# EAGLE board esp32 with mpu6050 (EAGLE 9.6.2)
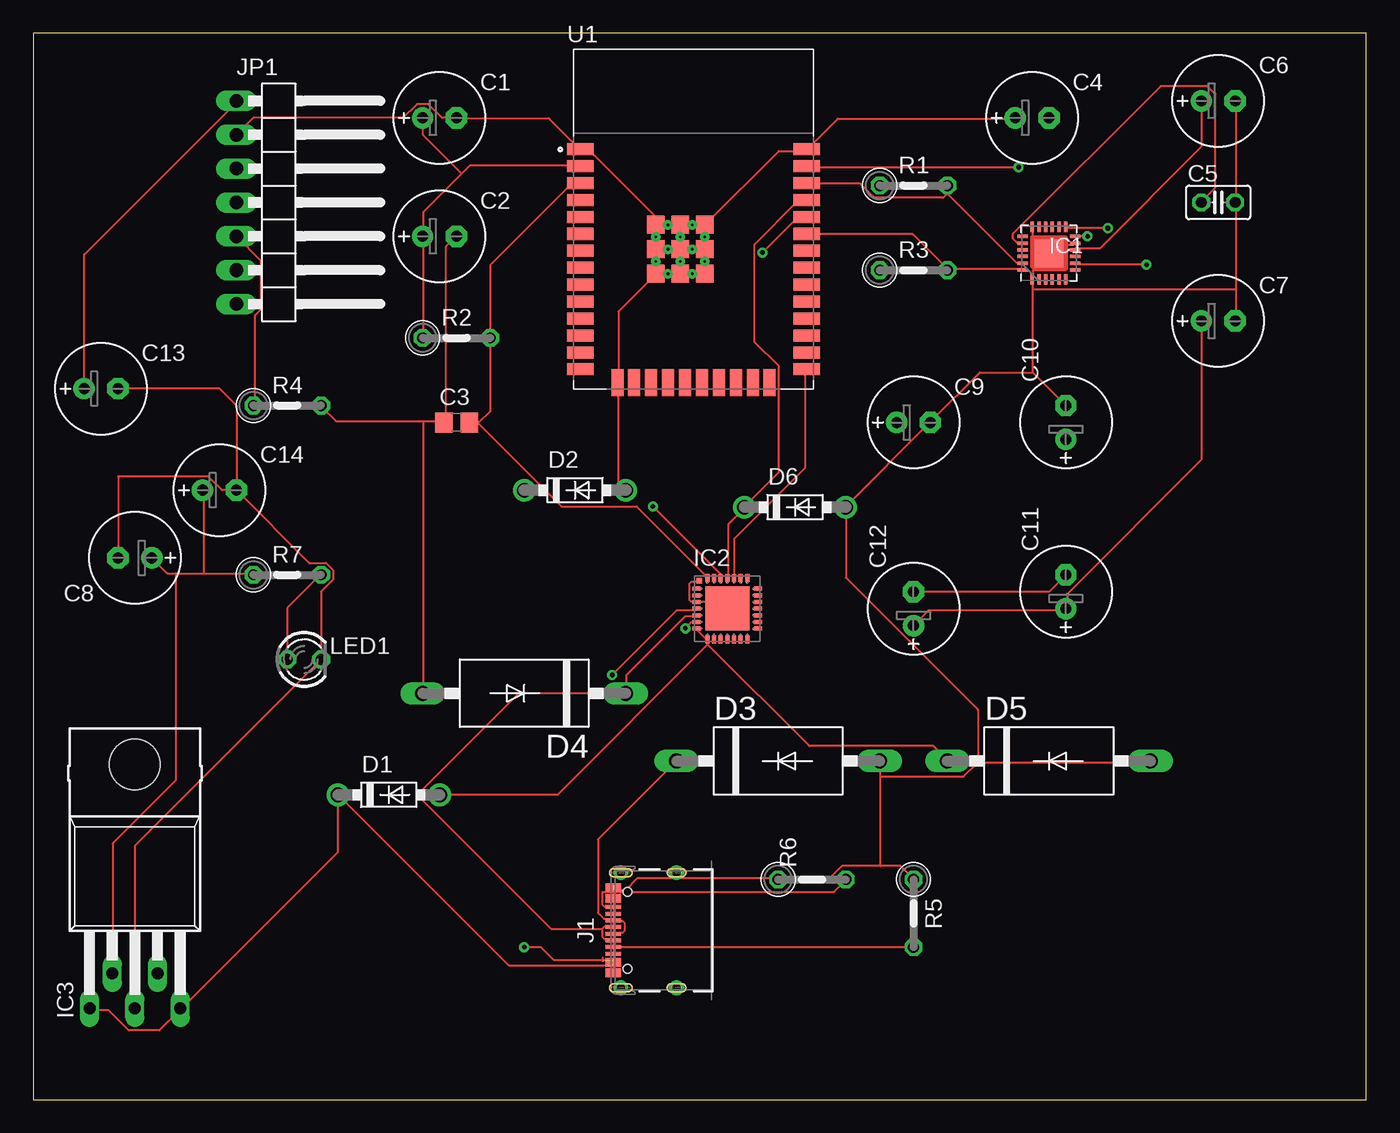
[diagram p0: board, top side]
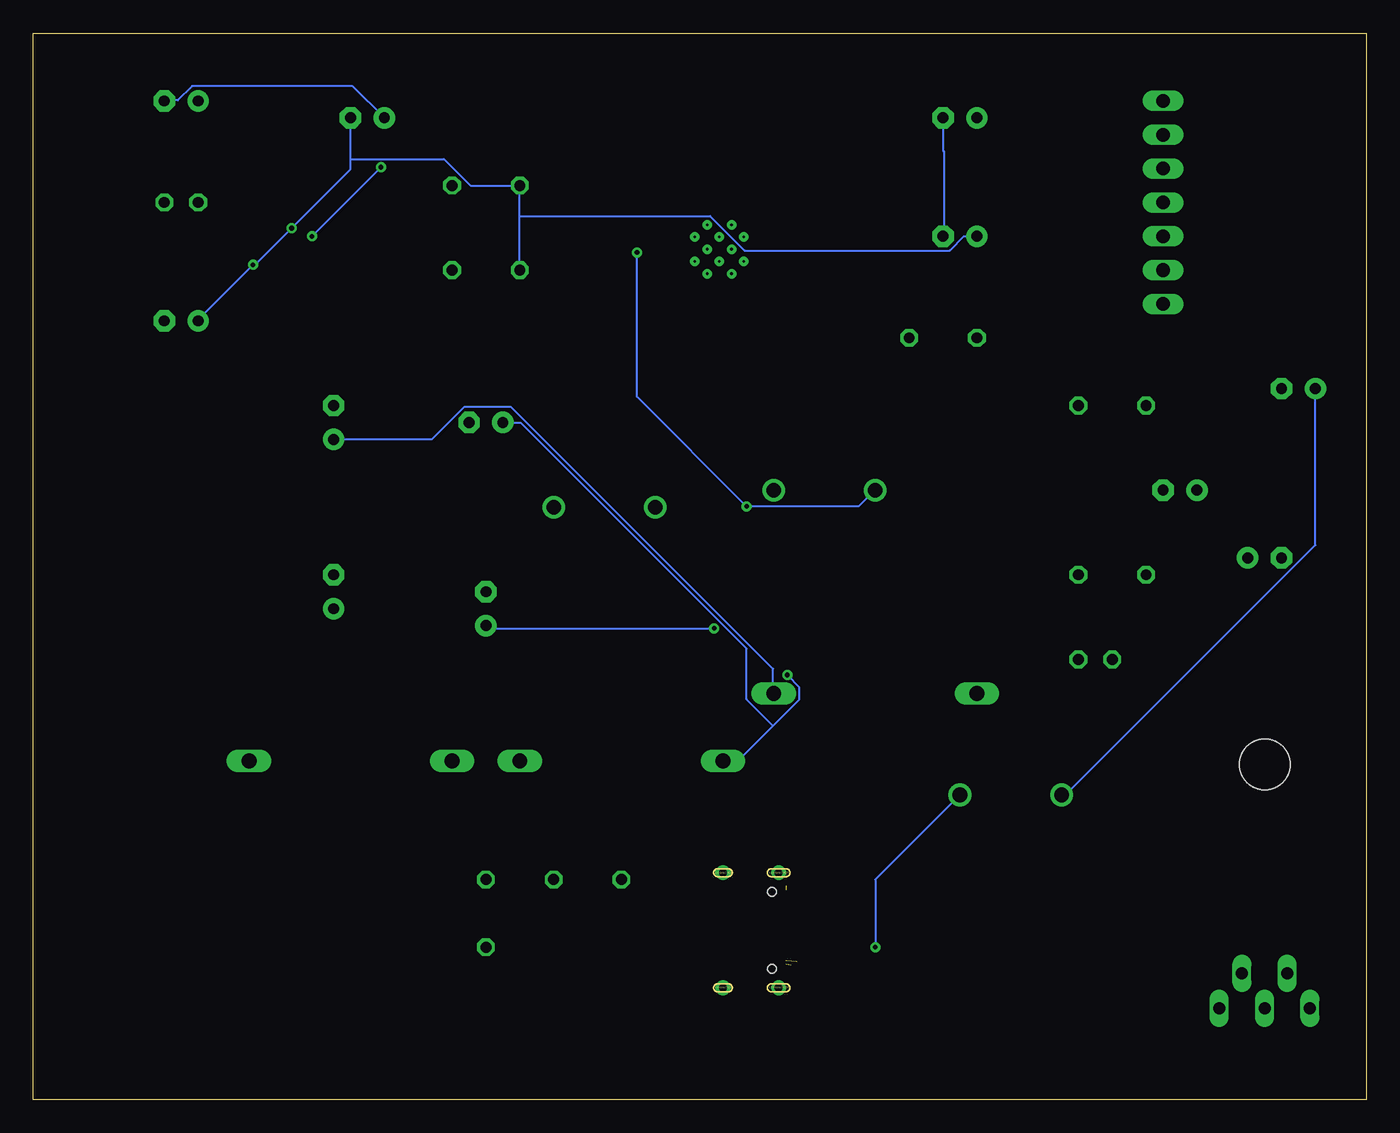
[diagram p1: board, bottom side, seen from below]

Size 100 x 80 mm. Coordinates in mm from the lower left corner, seen from the top.
Outline: 0,0 100,0 100,80 0,80 0,0
Copper layers (1*16): Top 0.035mm / dielectric 1.5mm / Bottom 0.035mm
Design rules "default": minimum track width 6mil, minimum drill 0.35mm, track to track 6mil, track to pad 6mil, pad to pad 6mil, via to via 6mil, smd to smd 6mil, copper to edge 40mil, drill to drill 6mil, minimum pad ring 10mil, minimum via ring 8mil, stop-mask expansion 4mil, vias tented up to drill 0mil, thermal gap 10mil

## Footprints (pad centres in the part's own frame; a part is rotated, then mirrored left to right if it is on the bottom)
E2,5-7 = drill 0.813 pad 1.6: + -1.27,0 | drill 0.813 pad 1.6 octagon: - 1.27,0
C0805 = smd 1.3 x 1.5: 1 -0.95,0; 2 0.95,0
C025-025X050 = drill 0.813 octagon: 1 -1.27,0; 2 1.27,0
DO41-7.6 = drill 1.1 pad 1.7: A 3.81,0; C -3.81,0
P3-15 = drill 1.118 long: A 7.62,0; C -7.62,0
QFN50P400X400X95-25T265X275N = smd 0.26 x 0.79: 1 -1.25,-1.97; 2 -0.75,-1.97; 3 -0.25,-1.97; 4 0.25,-1.97; 5 0.75,-1.97; 6 1.25,-1.97; 13 1.25,1.97; 14 0.75,1.97; 15 0.25,1.97; 16 -0.25,1.97; 17 -0.75,1.97; 18 -1.25,1.97 | smd 0.79 x 0.26: 7 1.97,-1.25; 8 1.97,-0.75; 9 1.97,-0.25; 10 1.97,0.25; 11 1.97,0.75; 12 1.97,1.25; 19 -1.97,1.25; 20 -1.97,0.75; 21 -1.97,0.25; 22 -1.97,-0.25; 23 -1.97,-0.75; 24 -1.97,-1.25 | smd 2.15 x 2.05: 25 0,0
MLP28 = smd 0.6 x 0.3: 1 -2.3,1.5; 2 -2.3,1; 3 -2.3,0.5; 4 -2.3,0; 5 -2.3,-0.5; 6 -2.3,-1; 7 -2.3,-1.5; 15 2.3,-1.5; 16 2.3,-1; 17 2.3,-0.5; 18 2.3,0; 19 2.3,0.5; 20 2.3,1; 21 2.3,1.5 | smd 0.3 x 0.6: 8 -1.5,-2.3; 9 -1,-2.3; 10 -0.5,-2.3; 11 0,-2.3; 12 0.5,-2.3; 13 1,-2.3; 14 1.5,-2.3; 22 1.5,2.3; 23 1,2.3; 24 0.5,2.3; 25 0,2.3; 26 -0.5,2.3; 27 -1,2.3; 28 -1.5,2.3 | smd 3.3 x 3.3: EXP 0,0 | smd 0.435 x 0.435: M -2.103,2.103
TO220-52 = drill 0.9 long: 1 -3.4,-21.1; 2 -1.7,-18.47; 3 0,-21.1; 4 1.7,-18.47; 5 3.4,-21.1 | hole 3.8: 0,-2.8
629722000214 = smd 0.3 x 1.15: A1 -3.35,4.745; A4 -2.55,4.745; A5 -1.25,4.745; A6 -0.25,4.745; A7 0.25,4.745; A8 1.25,4.745; A9 2.55,4.745; A12 3.35,4.745; B1 3.05,4.745; B4 2.25,4.745; B5 1.75,4.745; B6 0.75,4.745; B7 -0.75,4.745; B8 -1.75,4.745; B9 -2.25,4.745; B12 -3.05,4.745 | drill 0.6 pad 1: S1 -4.32,4.18; S2 4.32,4.18; S3 -4.32,0; S4 4.32,0 | hole 0.65: -2.89,3.68; 2.89,3.68
1X07/90 = drill 1.016 long: 1 -7.62,-3.81; 2 -5.08,-3.81; 3 -2.54,-3.81; 4 0,-3.81; 5 2.54,-3.81; 6 5.08,-3.81; 7 7.62,-3.81
LED3MM = drill 0.813 octagon: A -1.27,0; K 1.27,0
0207/5V = drill 0.813 octagon: 1 -2.54,0; 2 2.54,0
MODULE_ESP32-WROOM-32D = smd 2 x 0.9: 1 -8.5,5.26; 2 -8.5,3.99; 3 -8.5,2.72; 4 -8.5,1.45; 5 -8.5,0.18; 6 -8.5,-1.09; 7 -8.5,-2.36; 8 -8.5,-3.63; 9 -8.5,-4.9; 10 -8.5,-6.17; 11 -8.5,-7.44; 12 -8.5,-8.71; 13 -8.5,-9.98; 14 -8.5,-11.25; 25 8.5,-11.25; 26 8.5,-9.98; 27 8.5,-8.71; 28 8.5,-7.44; 29 8.5,-6.17; 30 8.5,-4.9; 31 8.5,-3.63; 32 8.5,-2.36; 33 8.5,-1.09; 34 8.5,0.18; 35 8.5,1.45; 36 8.5,2.72; 37 8.5,3.99; 38 8.5,5.26 | smd 0.9 x 2: 15 -5.715,-12.25; 16 -4.445,-12.25; 17 -3.175,-12.25; 18 -1.905,-12.25; 19 -0.635,-12.25; 20 0.635,-12.25; 21 1.905,-12.25; 22 3.175,-12.25; 23 4.445,-12.25; 24 5.715,-12.25 | smd 1.33 x 1.33: 39_1 -2.835,-0.405; 39_2 -1,-0.405; 39_3 0.835,-0.405; 39_4 -2.835,-2.24; 39_5 -1,-2.24; 39_6 0.835,-2.24; 39_7 -2.835,-4.075; 39_8 -1,-4.075; 39_9 0.835,-4.075 | drill 0.2 pad 0.3: 39_10 -1.917,-0.405; 39_11 -0.083,-0.405; 39_12 -2.835,-1.323; 39_13 -1,-1.323; 39_14 0.835,-1.323; 39_15 -1.917,-2.24; 39_16 -0.083,-2.24; 39_17 -2.835,-3.158; 39_18 -1,-3.158; 39_19 0.835,-3.158; 39_20 -1.917,-4.075; 39_21 -0.083,-4.075

## Placement (x,y rotation side)
C1  0.1uf  [E2,5-7]  30.48,73.66 0 top
C2  10uf  [E2,5-7]  30.48,64.77 0 top
C3  TBD  [C0805]  31.75,50.8 0 top
C4  0.01u  [E2,5-7]  74.93,73.66 0 top
C5  2200pf  [C025-025X050]  88.9,67.31 0 top
C6  0.1u  [E2,5-7]  88.9,74.93 0 top
C7  0.1u  [E2,5-7]  88.9,58.42 0 top
C8  0.1u  [E2,5-7]  7.62,40.64 180 top
C9  [E2,5-7]  66.04,50.8 0 top
C10  [E2,5-7]  77.47,50.8 90 top
C11  [E2,5-7]  77.47,38.1 90 top
C12  [E2,5-7]  66.04,36.83 90 top
C13  4.7u  [E2,5-7]  5.08,53.34 0 top
C14  10u  [E2,5-7]  13.97,45.72 0 top
D1  1N5817-B  [DO41-7.6]  26.67,22.86 0 top
D2  1N5817-B  [DO41-7.6]  40.64,45.72 0 top
D3  ZZY22  [P3-15]  55.88,25.4 0 top
D4  ZZY22  [P3-15]  36.83,30.48 180 top
D5  ZZY22  [P3-15]  76.2,25.4 0 top
D6  1N5817-B  [DO41-7.6]  57.15,44.45 0 top
IC1  MPU6050  [QFN50P400X400X95-25T265X275N]  76.2,63.5 0 top
IC2  CP2101  [MLP28]  52.07,36.83 0 top
IC3  3.3V  [TO220-52]  7.62,27.94 0 top
J1  629722000214  [629722000214]  48.26,12.7 90 top
JP1  [1X07/90]  19.05,67.31 270 top
LED1  [LED3MM]  20.32,33.02 0 top
R1  4.7k  [0207/5V]  66.04,68.58 0 top
R2  TBD  [0207/5V]  31.75,57.15 0 top
R3  4.7k  [0207/5V]  66.04,62.23 0 top
R4  [0207/5V]  19.05,52.07 0 top
R5  [0207/5V]  66.04,13.97 270 top
R6  [0207/5V]  58.42,16.51 0 top
R7  [0207/5V]  19.05,39.37 0 top
U1  ESP32-WROOM-32D  [MODULE_ESP32-WROOM-32D]  49.53,66.04 0 top

## Library data of the parts
C1-C14 = rcl; SPICEPREFIX: C
D1-D6 = diode
IC1 = invensense
IC2 = silabs; MF: FARNELL; MPN: CP2102-GM; OC_FARNELL: 9282130; OC_NEWARK: 30K5635
IC3 = linear
J1 = Eagle_WR-USB (rev22c); APPLICATION: USB 2.0; DATASHEET-URL: https://www.we-online.com/redexpert/spec/629722000214?ae; GERDER: Receptacle; INTERFACE-TYPE: Type C; IR: 5A; MOUNT: SMT; PACKAGING: Tape and Reel; PART-NUMBER: 629722000214; PINS: 16; TYPE: Horizontal; WORKING-VOLTAGE: 20V(AC)
JP1 = pinhead
LED1 = led
R1-R7 = rcl; SPICEPREFIX: R
U1 = ESP32-WROOM-32D; AVAILABILITY: In Stock; CHECK_PRICES: https://www.snapeda.com/parts/ESP32-WROOM-32D/Espressif+Systems/view-part/?ref=eda; DESCRIPTION: Bluetooth, WiFi 802.11b/g/n, Bluetooth v4.2 +EDR, Class 1, 2 and 3 Transceiver Module 2.4GHz ~ 2.5GHz Integrated; MF: Espressif Systems; MP: ESP32-WROOM-32D; PACKAGE: Non Standard Espressif Systems; PRICE: None; SNAPEDA_LINK: https://www.snapeda.com/parts/ESP32-WROOM-32D/Espressif+Systems/view-part/?ref=snap

## Nets
0: C8.- C13.- C14.- IC3.3 LED1.K
0V: C1.- C2.- C3.1 C4.+ C5.2 C6.- C7.- C9.- C10.- D2.A D3.A D4.A D5.A D6.A IC1.1 IC1.11 IC1.18 IC1.25 J1.A1 J1.A12 J1.B1 J1.B12 JP1.2 R4.2 R5.1 R6.1 U1.1 U1.15 U1.38 U1.39_1 U1.39_2 U1.39_3 U1.39_4 U1.39_5 U1.39_6 U1.39_7 U1.39_8 U1.39_9 U1.39_10 U1.39_11 U1.39_12 U1.39_13 U1.39_14 U1.39_15 U1.39_16 U1.39_17 U1.39_18 U1.39_19 U1.39_20 U1.39_21
+3V3: C1.+ C2.+ C4.- C7.+ C11.+ C12.+ IC1.8 IC1.13 IC2.6 R1.1 R2.1 R3.1 U1.2
+5V: C13.+ D1.C IC3.1 IC3.5 J1.A4 JP1.1
AD0: JP1.5 R4.1
D(+): C9.+ D3.C IC2.4 J1.A6 J1.B6
D(-): C10.+ D4.C IC2.5 J1.A7 J1.B7
GND: C11.- C12.-
INT: JP1.7
N$1: IC1.24 R3.2 U1.33
N$2: C3.2 IC2.28 R2.2 U1.3
N$3: C5.1 IC1.20
N$4: LED1.A R7.2
N$5: C6.+ IC1.10
N$6: IC1.23 R1.2 U1.36
N$8: IC1.12 U1.37
N$9: IC2.24 U1.25
N$12: J1.B5 R6.2
N$13: J1.A5 R5.2
N$16: D1.A D5.C IC2.7 IC2.8 J1.B9
N$17: D2.C IC2.26 U1.34
N$18: D6.C IC2.25 U1.35
N$19: IC2.3 IC2.EXP IC2.M
N$20: C8.+ C14.+ IC3.2 R7.1
SCL: JP1.3
SDA: JP1.4
XCL: JP1.6

## Tracks (layer width: path | path; a pad name or v marks a point on that pad's centre or on a via)
0
  Top 0.152: IC3.3 7.62,19.05 LED1.K 21.59,38.11 22.48,39 22.48,39.74 21.96,40.26 20.7,40.26 C14.- | C14.- 15.24,52.07 13.97,53.34 C13.- | C14.- 14.15,45.72 13.13,46.75 6.35,46.75 C8.-
  Bottom 0.152: 21.49,33.07 LED1.K
0V  (1 unrouted)
  Top 0.152: 55.93,16.61 59.74,16.61 60.66,17.53 63.55,17.53 | 63.55,17.53 65.08,17.53 65.99,16.61 R5.1 | 55.93,16.61 R6.1 | 63.55,17.53 63.55,24.23 | 63.55,24.23 63.55,25.3 D3.A | 70.87,25.3 83.82,25.3 D5.A | 70.87,25.3 69.8,24.23 63.55,24.23 | C6.- 90.22,74.83 90.22,67.36 C5.2 90.22,67.21 90.22,60.81 | 90.22,60.81 90.22,58.52 C7.- | 76.2,63.55 74.98,64.77 74.98,65.38 IC1.18 | 76.2,63.55 76.81,64.16 78.03,64.16 IC1.11 | 76.2,63.55 IC1.25 76.2,63.4 74.98,62.18 74.98,61.57 IC1.1 74.98,61.42 74.98,60.81 | 74.98,54.56 74.98,60.81 | C10.- 74.98,54.56 | 74.98,54.56 71.02,54.56 67.36,50.9 C9.- 67.21,50.75 60.96,44.5 D6.A 60.96,39.17 70.87,29.26 70.87,25.3 | 74.98,60.81 90.22,60.81 | 29.26,50.9 22.71,50.9 21.64,51.97 R4.2 | 29.26,50.9 30.79,50.9 C3.1 30.94,50.9 30.94,64.01 31.7,64.77 C2.- | 29.26,50.9 29.26,30.48 D4.A | D2.A 44.35,45.72 43.89,46.18 43.89,53.65 U1.15 43.89,53.8 43.89,59.13 46.63,61.87 U1.39_7 46.79,62.03 | U1.39_19 50.44,62.79 50.44,62.03 U1.39_9 50.29,62.03 49.53,62.03 U1.39_21 49.38,62.03 48.62,62.03 | 48.62,63.86 48.62,64.62 U1.39_13 | 48.62,62.03 48.62,62.79 U1.39_18 | 46.79,62.03 46.79,62.79 U1.39_17 46.79,62.94 46.79,63.7 U1.39_4 46.79,63.86 | 46.79,63.86 46.79,64.62 U1.39_12 | 46.79,62.03 47.55,62.03 U1.39_20 47.7,62.03 48.46,62.03 U1.39_8 48.62,62.03 | 46.79,63.86 47.55,63.86 U1.39_15 47.7,63.86 48.46,63.86 U1.39_5 48.62,63.86 | 48.62,63.86 49.38,63.86 U1.39_16 49.53,63.86 50.29,63.86 U1.39_6 50.44,63.86 50.44,64.62 U1.39_14 50.44,64.77 50.44,65.53 U1.39_3 | U1.39_3 50.29,65.68 49.53,65.68 U1.39_11 49.38,65.68 48.62,65.68 U1.39_2 48.46,65.68 47.7,65.68 U1.39_10 47.55,65.68 46.79,65.68 U1.39_1 46.63,65.68 46.63,66.29 41.76,71.17 41.15,71.17 U1.1 41,71.32 38.71,73.61 31.85,73.61 C1.- 30.66,73.66 29.64,74.69 28.78,74.69 27.75,73.66 16.51,73.66 JP1.2
  Top 0.152: U1.39_3 50.44,65.68 55.93,71.17 57.91,71.17 U1.38 58.06,71.32 60.35,73.61 73.61,73.61 C4.+ | J1.B1 44.45,15.75 45.31,16.61 55.93,16.61 | J1.A12 J1.B12 J1.A1
  Bottom 0.152: 31.7,71.17 31.7,71.12 | 31.7,71.12 31.7,64.77 C2.- | C4.+ 76.05,76.05 88.09,76.05 89.15,74.98 90.07,74.98 C6.- | C1.- 31.75,71.17 31.7,71.12
+3V3  (via drill 0.35)
  Top 0.152: v48.92,35.36 49.38,35.81 49.68,35.81 IC2.6 | C12.+ 67.21,36.73 77.42,36.73 C11.+ 77.57,36.88 77.57,37.95 87.63,48.01 C7.+ | 29.26,64.77 29.26,57.15 R2.1 | C1.+ 29.21,72.39 32.13,69.47 | U1.2 41,70.1 32.77,70.1 32.13,69.47 | 29.26,64.77 29.26,66.6 32.13,69.47 | 29.26,64.77 C2.+ | v83.52,62.64 78.18,62.64 IC1.8 | v80.62,65.38 77.57,65.38 IC1.13
  Bottom 0.152: v48.92,35.36 65.84,35.36 C12.+ | 63.55,68.58 63.55,66.29 | 63.55,66.29 63.55,62.33 R3.1 | C7.+ 87.63,58.52 v83.52,62.64 83.36,62.64 v80.62,65.38 76.2,69.8 76.2,70.56 | 76.2,70.56 C4.- | 63.55,68.58 67.21,68.58 69.19,70.56 76.2,70.56 | 63.55,68.58 R1.1 | C2.+ 30.18,64.77 31.24,63.7 46.63,63.7 49.23,66.29 63.55,66.29
+5V  (1 unrouted)
  Top 0.152: C13.+ 3.81,63.4 15.24,74.83 JP1.1 | IC3.1 4.27,6.71 5.64,6.71 7.16,5.18 9.45,5.18 10.97,6.71 IC3.5 11.12,6.86 22.86,18.59 D1.C 35.65,10.07 43.16,10.07
  Bottom 0.152: C13.+ 3.81,41.6 22.55,22.86 D1.C
AD0
  Top 0.152: JP1.5 17.07,62.94 17.07,59.28 16.61,58.83 16.61,52.12 R4.1
D(+)  (via drill 0.35)
  Top 0.152: J1.A6 43.59,12.5 44.2,12.5 44.35,12.65 44.35,13.26 44.2,13.41 43.59,13.41 J1.B6 43.43,13.56 42.82,13.56 42.37,14.02 42.37,19.51 D3.C | v43.43,31.85 48.31,36.73 49.68,36.73 IC2.4
  Bottom 0.152: v43.43,31.85 42.52,30.94 42.52,30.02 44.5,28.04 | 44.5,28.04 47.09,25.45 48.16,25.45 D3.C | 44.5,28.04 46.48,30.02 46.48,33.83 63.4,50.75 64.77,50.75 C9.+
D(-)
  Top 0.152: 42.67,12.8 42.67,12.19 42.82,12.04 43.43,12.04 J1.B7 | 42.67,12.8 42.82,12.95 43.43,12.95 J1.A7 | IC2.5 49.68,36.27 48.92,36.27 44.5,31.85 44.5,30.48 D4.C 36.42,30.48 29.26,23.32 29.26,22.4 38.86,12.8 42.67,12.8
  Bottom 0.152: C10.+ 70.1,49.53 67.67,51.97 64.16,51.97 44.5,32.31 44.5,30.48 D4.C
GND
  Top 0.152: C12.- 76.2,38.1 C11.-
N$1
  Top 0.152: 68.58,62.33 74.22,62.33 IC1.24 | 68.58,62.33 65.99,64.92 58.06,64.92 U1.33 | 68.58,62.33 R3.2
N$2
  Top 0.152: U1.3 41,68.73 40.39,68.73 34.29,62.64 R2.2 34.29,51.66 33.38,50.75 | 33.38,50.75 39.62,44.5 45.26,44.5 50.44,39.32 50.44,39.17 IC2.28 | 33.38,50.75 32.77,50.75 C3.2
N$3
  Top 0.152: IC1.20 74.22,64.31 73.76,64.31 73.46,64.62 73.46,64.92 84.58,76.05 88.09,76.05 88.7,75.44 88.7,68.43 87.63,67.36 C5.1
N$4
  Top 0.152: LED1.A 19.05,36.88 21.49,39.32 R7.2
N$5
  Top 0.152: C6.+ 87.63,71.48 80.01,63.86 78.18,63.86 IC1.10
N$6
  Top 0.152: 68.58,67.97 73.76,62.79 74.22,62.79 IC1.23 | 68.58,67.97 68.28,67.67 63.09,67.67 62.03,68.73 58.06,68.73 U1.36 | 68.58,67.97 R1.2
N$8  (via drill 0.35)
  Top 0.152: v79.1,64.77 78.18,64.77 IC1.12 | v73.91,69.95 58.06,69.95 U1.37
  Bottom 0.152: v73.91,69.95 v79.1,64.77
N$9
  Top 0.152: IC2.24 52.58,39.17 52.58,42.06 57.91,47.4 57.91,54.71 U1.25
N$12
  Top 0.152: J1.B5 43.43,14.48 42.82,14.48 42.67,14.63 42.67,15.54 60.05,15.54 60.96,16.46 R6.2
N$13
  Top 0.152: R5.2 43.59,11.43 J1.A5
N$16  (via drill 0.35)  (1 unrouted)
  Top 0.152: IC2.7 49.84,35.2 50.44,34.59 IC2.8 50.6,34.44 50.6,34.14 | 50.6,34.14 58.22,26.52 67.51,26.52 68.58,25.45 D5.C | D1.A 39.32,22.86 50.6,34.14 | 42.71,10.63 42.71,10.38 | J1.B9 39.08,10.45 38.1,11.43 v36.83,11.43
  Bottom 0.152: D1.A 36.83,16.51 v36.83,11.43
N$17  (via drill 0.35)
  Top 0.152: v46.48,44.5 51.51,39.47 51.51,39.17 IC2.26 | v54.71,63.55 57.3,66.14 57.91,66.14 U1.34
  Bottom 0.152: D2.C 36.88,45.72 38.1,44.5 v46.48,44.5 54.71,52.73 v54.71,63.55
N$18
  Top 0.152: IC2.25 52.12,39.17 52.12,43.13 53.34,44.35 D6.C 53.34,44.5 55.93,47.09 55.93,55.02 54.1,56.84 54.1,64.16 57.3,67.36 57.91,67.36 U1.35
N$19
  Top 0.152: IC2.M 49.84,38.86 49.38,38.86 49.23,38.71 49.23,37.49 49.38,37.34 49.68,37.34 IC2.3 49.84,37.34 51.51,37.34 51.97,36.88 IC2.EXP
N$20
  Top 0.152: 10.67,39.47 10.06,39.47 C8.+ | 10.67,39.47 12.8,39.47 | 12.8,39.47 16.46,39.47 R7.1 | 10.67,39.47 10.67,23.93 5.94,19.2 5.94,9.6 IC3.2 | 12.8,39.47 12.8,45.72 C14.+